# EAGLE board STM32F413CG_WM8731 (EAGLE 9.2.0)
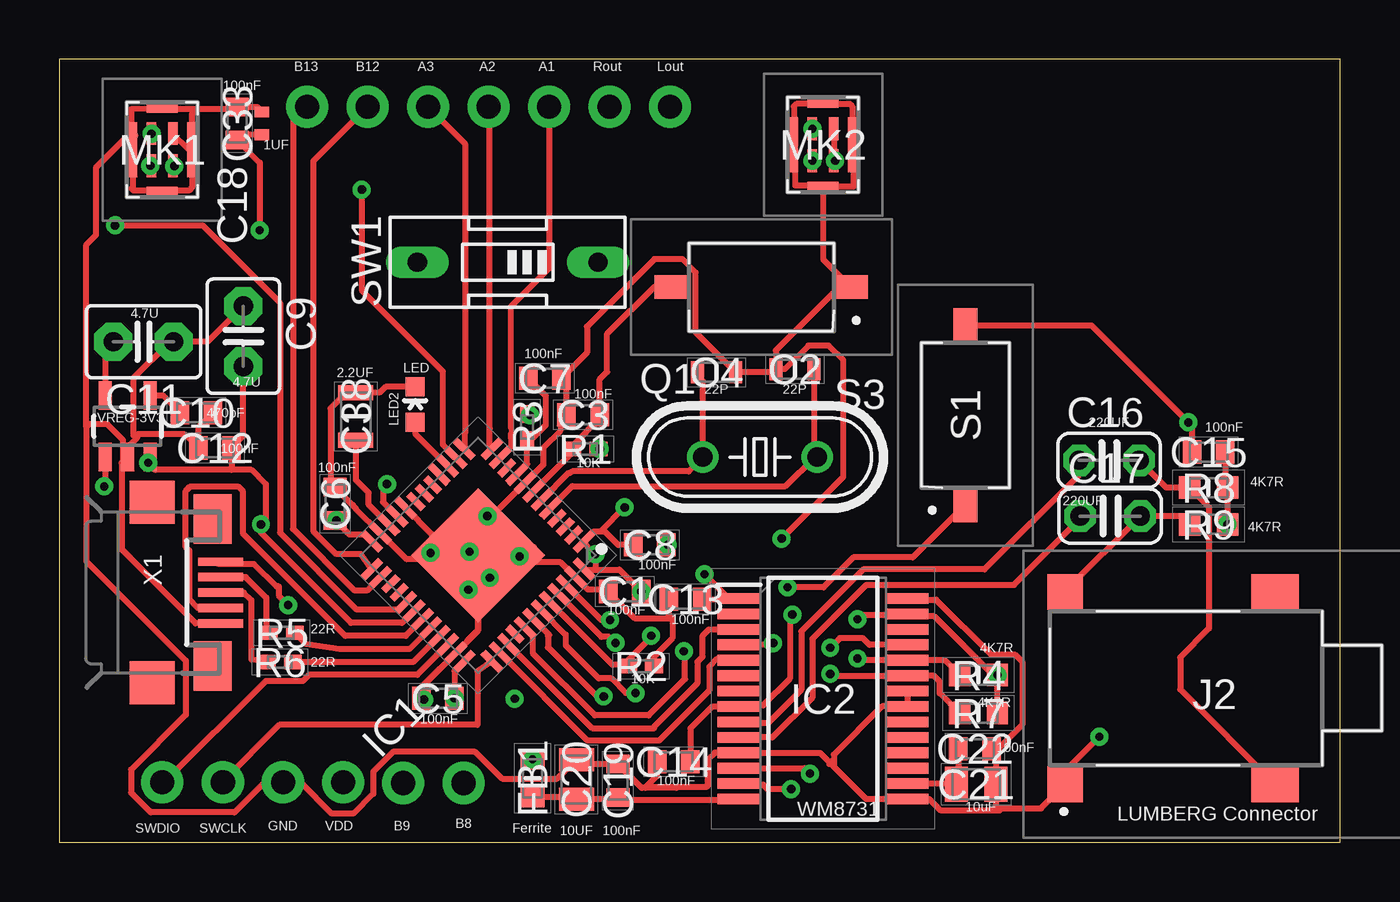
[diagram p0: board, top side]
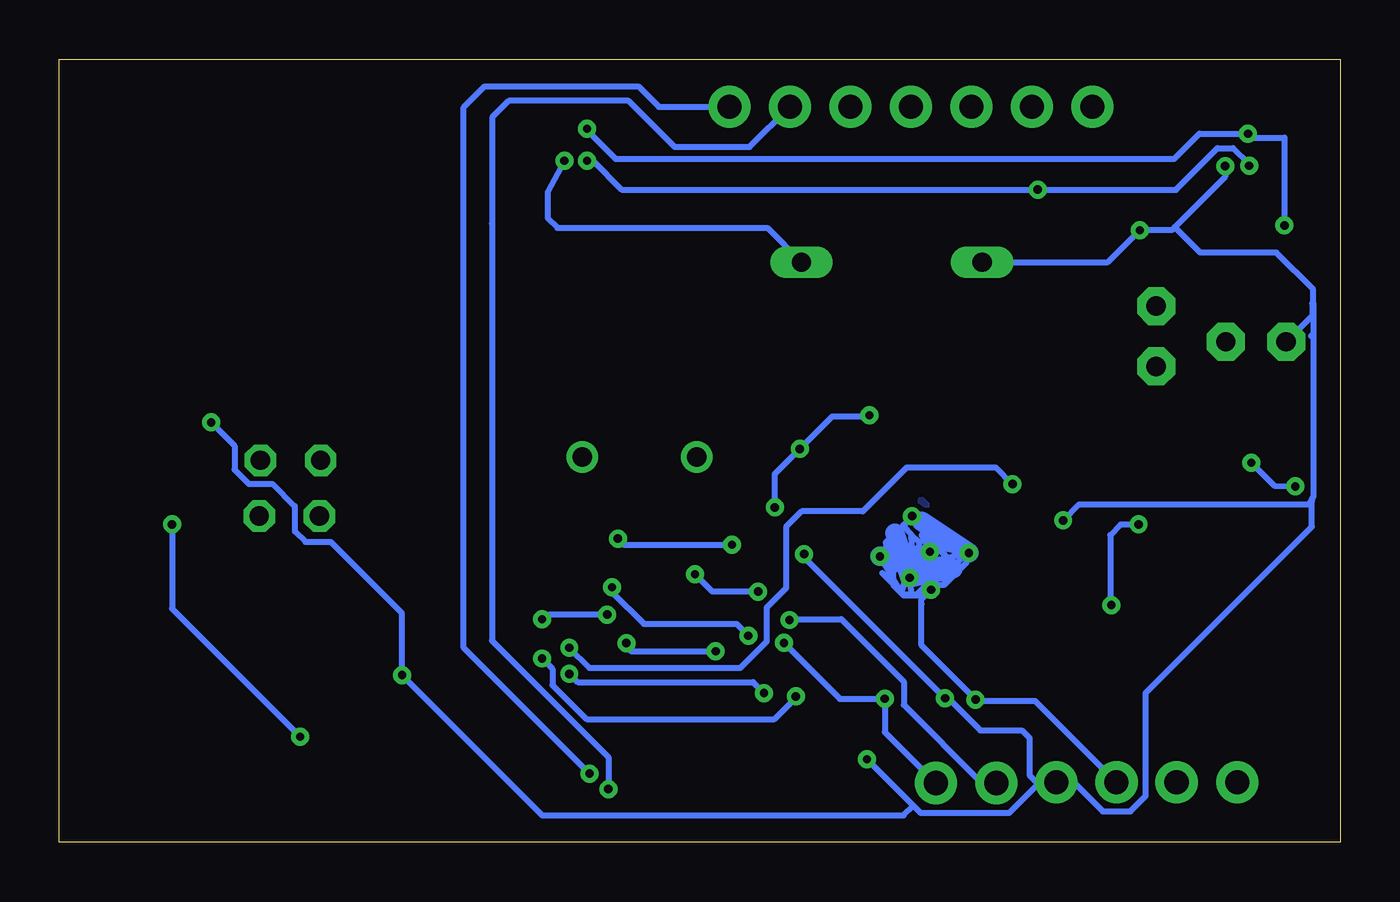
[diagram p1: board, bottom side, seen from below]

Size 54 x 33 mm. Coordinates in mm from the lower left corner, seen from the top.
Outline: 0,0 54,0 54,33 0,33 0,0
Copper layers (1*16): Top 0.035mm / dielectric 1.5mm / Bottom 0.035mm
Design rules "default *": minimum track width 6mil, minimum drill 0.35mm, track to track 0.2mm, track to pad 0.2mm, pad to pad 0.2mm, via to via 0.2mm, smd to smd 6mil, copper to edge 40mil, drill to drill 6mil, minimum pad ring 10mil, minimum via ring 8mil, stop-mask expansion 4mil, vias tented up to drill 0mil, thermal gap 10mil
Net classes: 0 default: width 0.254 mm, drill 0.35 mm

## Footprints (pad centres in the part's own frame; a part is rotated, then mirrored left to right if it is on the bottom)
CAPC1608X95N = smd 0.78 x 0.98: 1 -0.7,0; 2 0.7,0
CAPC1608X80N = smd 0.54 x 0.94: 1 -0.8,0; 2 0.8,0
C2.5-3 = drill 0.813 pad 1.6 octagon: 1 -1.27,0; 2 1.27,0
CAPC1608X87N = smd 0.78 x 0.98: 1 -0.7,0; 2 0.7,0
C025-024X044 = drill 0.813 octagon: 1 -1.27,0; 2 1.27,0
CAPC1005X55N = smd 0.457 x 0.61: 1 -0.483,0; 2 0.483,0
CAPC2012X145N = smd 0.97 x 1.47: 1 -0.83,0; 2 0.83,0
CAPC2012X145N' = smd 0.62 x 1.47: 1 -1,0; 2 1,0
BEADC1608X95N = smd 0.85 x 1: 1 -0.8,0; 2 0.8,0
QFN50P700X700X60-49N = smd 1.08 x 0.3: 1 -3.57,2.75; 5 -3.567,0.75; 6 -3.567,0.25; 7 -3.567,-0.25; 8 -3.567,-0.75; 9 -3.567,-1.25; 11 -3.567,-2.25; 12 -3.59,-2.75; 25 3.59,-2.75; 26 3.567,-2.25; 29 3.567,-0.75; 30 3.567,-0.25; 31 3.567,0.25; 32 3.567,0.75; 33 3.567,1.25; 34 3.567,1.75; 35 3.567,2.25; 36 3.58,2.75 | smd 0.85 x 0.3: 2 -3.45,2.25; 3 -3.45,1.75; 4 -3.45,1.25; 10 -3.45,-1.75; 27 3.45,-1.75; 28 3.45,-1.25 | smd 0.3 x 1.08: 13 -2.75,-3.59; 14 -2.25,-3.567; 15 -1.75,-3.567; 16 -1.25,-3.567; 20 0.75,-3.567; 21 1.25,-3.567; 22 1.75,-3.567; 23 2.25,-3.567; 24 2.75,-3.59; 37 2.75,3.58; 38 2.25,3.567; 39 1.75,3.567; 41 0.75,3.567; 42 0.25,3.567; 43 -0.25,3.567; 44 -0.75,3.567; 45 -1.25,3.567; 46 -1.75,3.567; 47 -2.25,3.567; 48 -2.75,3.57 | smd 0.3 x 0.85: 17 -0.75,-3.45; 18 -0.25,-3.45; 19 0.25,-3.45; 40 1.25,3.45 | smd 4 x 4: 49 0,0
SOP65P780X200-28N = smd 1.8 x 0.45: 1 -3.55,4.225; 2 -3.55,3.575; 3 -3.55,2.925; 4 -3.55,2.275; 5 -3.55,1.625; 6 -3.55,0.975; 7 -3.55,0.325; 8 -3.55,-0.325; 9 -3.55,-0.975; 10 -3.55,-1.625; 11 -3.55,-2.275; 12 -3.55,-2.925; 13 -3.55,-3.575; 14 -3.55,-4.225; 15 3.55,-4.225; 16 3.55,-3.575; 17 3.55,-2.925; 18 3.55,-2.275; 19 3.55,-1.625; 20 3.55,-0.975; 21 3.55,-0.325; 22 3.55,0.325; 23 3.55,0.975; 24 3.55,1.625; 25 3.55,2.275; 26 3.55,2.925; 27 3.55,3.575; 28 3.55,4.225
150302 = smd 1.5 x 1.5: 1 6.3,3.8; 4 6.3,-4.3 | smd 2 x 1.5: 2 -2.55,3.8; 3 -2.55,-4.3
1X1-HEADER-HOLE = drill 1.016 pad 1.778: 1 0,0
LED-0603 = smd 0.8 x 0.8: A 0,-0.75; C 0,0.75
MP34DT05TRA = smd 0.4 x 0.95: 1 -0.45,0.675; 2 -0.45,-0.675; 3 0.45,-0.675; 4 0.45,0.675 | smd 0.35 x 2.3: 5 -1.225,0; 6 1.225,0 | smd 1.3 x 0.35: 7 0,1.725; 8 0,-1.725
HC49/S = drill 0.813: 1 -2.413,0; 2 2.413,0
RESC1005X40N = smd 0.75 x 0.6: 1 -0.55,0; 2 0.55,0
RESC1608X55N = smd 0.9 x 0.95: 1 -0.8,0; 2 0.8,0
PTS636SK25JSMTRLFS = smd 1.45 x 1: 1 -3.775,0; 2 3.775,0
EDG-01 = drill 0.813 long: 1 0,-3.81; 2 0,3.81
SOT23-5 = smd 0.55 x 1.2: 1 -0.95,-1.3; 2 0,-1.3; 3 0.95,-1.3; 4 0.95,1.3; 5 -0.95,1.3
USB-MICROB-SMD = smd 0.35 x 1.9: D+ 0,2.9; D- -0.65,2.9; GND 1.3,2.9; ID 0.65,2.9; VBUS -1.3,2.9 | smd 1.8 x 1.9: MT1 -3.8,0; MT2 3.8,0 | smd 2.1 x 1.6: MT3 -3.1,2.55; MT4 3.1,2.55

## Placement (x,y rotation side)
C1  C0603C104M4RAC7411  [CAPC1608X95N]  23.84,10.57 180 top
C2  22P  [CAPC1608X80N]  31.01,19.94 0 top
C3  100n  [CAPC1608X95N]  22.08,18.02 0 top
C4  22P  [CAPC1608X80N]  27.71,19.81 180 top
C5  100n  [CAPC1608X95N]  15.96,6.07 0 top
C6  100n  [CAPC1608X95N]  11.63,14.27 90 top
C7  100n  [CAPC1608X95N]  20.47,19.56 180 top
C8  100n  [CAPC1608X95N]  24.89,12.54 0 top
C9  4.7u  [C2.5-3]  7.76,21.33 270 top
C10  470p  [CAPC1608X87N]  5.78,18.11 180 top
C11  4.7u  [C2.5-3]  3.55,21.1 180 top
C12  100n  [CAPC1608X95N]  6.56,16.62 0 top
C13  100n  [CAPC1608X95N]  26.4,10.25 180 top
C14  100n  [CAPC1608X95N]  25.9,3.4 0 top
C15  C0603C104M4RAC7411  [CAPC1608X95N]  48.45,16.45 180 top
C16  220UF  [C025-024X044]  44.25,16.1 0 top
C17  220UF  [C025-024X044]  44.3,13.75 0 top
C18  1UF  [CAPC1005X55N]  8.55,30.3 90 top
C19  C0603C104M4RAC7411  [CAPC1608X95N]  23.55,2.6 270 top
C20  CL21A106KAYNNNE_10UF  [CAPC2012X145N]  21.8,2.65 270 top
C21  CL21A106KAYNNNE  [CAPC2012X145N]  38.65,2.45 0 top
C22  C0603C104M4RAC7411  [CAPC1608X95N]  38.6,3.95 180 top
C33  100nf  [CAPC1608X95N]  7.5,30.3 90 top
C38  2.2UF  [CAPC2012X145N']  12.5,17.95 90 top
FB1  BLM18BD252SN1D  [BEADC1608X95N]  19.95,2.7 270 top
IC1  STM32F413CGU6  [QFN50P700X700X60-49N]  17.65,12.1 225 top
IC2  WM8731SEDS_RV  [SOP65P780X200-28N]  32.2,6.05 0 top
J2  1503_02  [150302]  48.7,6.25 180 top
JP1  [1X1-HEADER-HOLE]  9.43,2.53 270 top
JP2  [1X1-HEADER-HOLE]  6.9,2.53 270 top
JP3  [1X1-HEADER-HOLE]  4.34,2.53 270 top
JP4  [1X1-HEADER-HOLE]  11.97,2.53 90 top
JP5  [1X1-HEADER-HOLE]  17.05,2.5 0 top
JP6  [1X1-HEADER-HOLE]  10.45,31 0 top
JP7  [1X1-HEADER-HOLE]  13,31 0 top
JP8  [1X1-HEADER-HOLE]  20.65,31 0 top
JP9  [1X1-HEADER-HOLE]  18.1,31 0 top
JP10  [1X1-HEADER-HOLE]  15.55,31 0 top
JP11  [1X1-HEADER-HOLE]  14.5,2.5 0 top
JP12  [1X1-HEADER-HOLE]  23.2,31 0 top
JP13  [1X1-HEADER-HOLE]  25.75,31 0 top
LED2  [LED-0603]  15,18.45 0 top
MK1  MP34DT05TR-A  [MP34DT05TRA]  4.34,29.19 0 top
MK2  MP34DT05TR-A  [MP34DT05TRA]  32.2,29.4 0 top
Q1  [HC49/S]  29.54,16.24 0 top
R1  CRCW040210K0JNED  [RESC1005X40N]  22.18,16.58 180 top
R2  10K  [RESC1005X40N]  24.52,7.43 0 top
R3  CRCW040222R0FKED  [RESC1005X40N]  19.72,17.5 270 top
R4  CR0603-JW-472ELF  [RESC1608X55N]  38.75,7.05 180 top
R5  22R  [RESC1005X40N]  9.38,8.83 180 top
R6  22R  [RESC1005X40N]  9.3,7.6 180 top
R7  CR0603-JW-472ELF  [RESC1608X55N]  38.75,5.45 180 top
R8  CR0603-JW-472ELF  [RESC1608X55N]  48.45,14.95 0 top
R9  CR0603-JW-472ELF  [RESC1608X55N]  48.45,13.4 0 top
S1  PTS636_SK25J_SMTR_LFS  [PTS636SK25JSMTRLFS]  38.2,18 90 top
S3  PTS636_SK25J_SMTR_LFS  [PTS636SK25JSMTRLFS]  29.6,23.4 180 top
SW1  [EDG-01]  18.9,24.45 90 top
VREG-3V3  V_REG_LDOSMD  [SOT23-5]  2.88,17.54 0 top
X1  USB-MICROB-SMD  [USB-MICROB-SMD]  3.91,10.53 270 top

## Library data of the parts
C1 C3 C5-C8 C12-C15 C33 = C0603C104M4RAC7411; DESCRIPTION: KEMET - C0603C104M4RAC7411 - CAP, 0.1F, 16V, 20%, X7R, 0603; HEIGHT: 0.95mm; MANUFACTURER_NAME: Kemet; MANUFACTURER_PART_NUMBER: C0603C104M4RAC7411; MOUSER_PART_NUMBER: 80-C0603C104M4R7411; MOUSER_PRICE-STOCK: https://www.mouser.com/Search/Refine.aspx?Keyword=80-C0603C104M4R7411
C2 C4 = C1608C0G1H150J080AA_15pF; DESCRIPTION: TDK 0603 C 15pF Ceramic Multilayer Capacitor, 50 V dc, +125C, C0G Dielectric, +/-5% SMD; HEIGHT: 0.8mm; MANUFACTURER_NAME: TDK; MANUFACTURER_PART_NUMBER: C1608C0G1H150J080AA; MOUSER_PART_NUMBER: 810-C1608C0G1H150J; MOUSER_PRICE-STOCK: https://www.mouser.com/Search/Refine.aspx?Keyword=810-C1608C0G1H150J; RS_PART_NUMBER: 7882935; RS_PRICE-STOCK: https://uk.rs-online.com/web/p/products/7882935
C9 C11 = capacitor-wima
C10 = C0603C471K3RACTU_470pF; DESCRIPTION: KEMET - C0603C471K3RACTU - CAP, X7R, 470PF, 25V, 0603; HEIGHT: 0.87mm; MANUFACTURER_NAME: Kemet; MANUFACTURER_PART_NUMBER: C0603C471K3RACTU; MOUSER_PART_NUMBER: 80-C0603C471K3R; MOUSER_PRICE-STOCK: https://www.mouser.com/Search/Refine.aspx?Keyword=80-C0603C471K3R
C16 C17 = rcl; SPICEPREFIX: C
C18 = CC0402KRX5R6BB105_1UF; DESCRIPTION: CAPACITOR, 0402 1uF +/-10% 10V; HEIGHT: mm; MANUFACTURER_NAME: YAGEO (PHYCOMP); MANUFACTURER_PART_NUMBER: CC0402KRX5R6BB105; MOUSER_PART_NUMBER: 603-CC402KRX5R6BB105; MOUSER_PRICE-STOCK: https://www.mouser.com/Search/Refine.aspx?Keyword=603-CC402KRX5R6BB105
C19 C22 = C0603C104M4RAC7411_100nF; DESCRIPTION: KEMET - C0603C104M4RAC7411 - CAP, 0.1F, 16V, 20%, X7R, 0603; HEIGHT: 0.95mm; MANUFACTURER_NAME: Kemet; MANUFACTURER_PART_NUMBER: C0603C104M4RAC7411; MOUSER_PART_NUMBER: 80-C0603C104M4R7411; MOUSER_PRICE-STOCK: https://www.mouser.com/Search/Refine.aspx?Keyword=80-C0603C104M4R7411
C20 C21 = CL21A106KAYNNNE_10uF; DESCRIPTION: Samsung; HEIGHT: 1.45mm; MANUFACTURER_NAME: Samsung Electro-Mechanics; MANUFACTURER_PART_NUMBER: CL21A106KAYNNNE; MOUSER_PART_NUMBER: N/A; MOUSER_PRICE-STOCK: https://www.mouser.com/Search/Refine.aspx?Keyword=N%2FA
C38 = C2012X7R1E225K125AB; DESCRIPTION: TDK - C2012X7R1E225K125AB - CAPACITOR, MLCC, X7R, 2.2UF, 25V, 0805; HEIGHT: 1.45mm; MANUFACTURER_NAME: TDK; MANUFACTURER_PART_NUMBER: C2012X7R1E225K125AB; MOUSER_PART_NUMBER: 810-C2012X7R1E225K; MOUSER_PRICE-STOCK: https://www.mouser.com/Search/Refine.aspx?Keyword=810-C2012X7R1E225K; RS_PART_NUMBER: 9159394P; RS_PRICE-STOCK: http://uk.rs-online.com/web/p/products/9159394P
FB1 = BLM18BD252SN1D_Ferrite Bead; DESCRIPTION: 0603 Ferrite Bead,2K5,25%,50mA,1R5 Murata Ferrite Bead (Chip Ferrite Bead), 1.6 x 0.8 x 0.8mm (0603), 2500 impedance at 100 MHz; HEIGHT: 0.95mm; MANUFACTURER_NAME: Murata Electronics; MANUFACTURER_PART_NUMBER: BLM18BD252SN1D; MOUSER_PART_NUMBER: 81-BLM18BD252SN1D; MOUSER_PRICE-STOCK: https://www.mouser.com/Search/Refine.aspx?Keyword=81-BLM18BD252SN1D; RS_PART_NUMBER: 7241321P; RS_PRICE-STOCK: http://uk.rs-online.com/web/p/products/7241321P
IC1 = STM32F413CG_edited; DESCRIPTION: STMICROELECTRONICS - STM32F413CGU6 - MCU, ARM CORTEX-M4, 100MHZ, UFQFPN-48; HEIGHT: 0.6mm; MANUFACTURER_NAME: STMicroelectronics; MANUFACTURER_PART_NUMBER: STM32F413CGU6; MOUSER_PART_NUMBER: 511-STM32F413CGU6; MOUSER_PRICE-STOCK: https://www.mouser.com/Search/Refine.aspx?Keyword=511-STM32F413CGU6
IC2 = WM8731SEDS_RV_1; DESCRIPTION: WOLFSON MICROELECTRONICS - WM8731SEDS/RV - DAC, AUDIO, 24BIT, HEADPHONE, 28SSOP; HEIGHT: 2mm; MANUFACTURER_NAME: WOLFSON MICROELECTRONICS; MANUFACTURER_PART_NUMBER: WM8731SEDS/RV
J2 = 1503_02; DESCRIPTION: LUMBERG - 1503 02 - CONNECTOR, RECEPTACLE, 3.5MM PHONO, 3WAY; HEIGHT: 5mm; MANUFACTURER_NAME: LUMBERG; MANUFACTURER_PART_NUMBER: 1503 02
JP1-JP13 LED2 VREG-3V3 X1 = F405Pill
MK1 MK2 = MP34DT05TR-A; DESCRIPTION: STMICROELECTRONICS - MP34DT05TR-A - MEMS MICROPHONE, 3.6V, HCLGA-4; HEIGHT: 1mm; MANUFACTURER_NAME: STMicroelectronics; MANUFACTURER_PART_NUMBER: MP34DT05TR-A; MOUSER_PART_NUMBER: 511-MP34DT05TR-A; MOUSER_PRICE-STOCK: https://www.mouser.com/Search/Refine.aspx?Keyword=511-MP34DT05TR-A
Q1 = crystal; OC_FARNELL: 1667008; OC_NEWARK: unknown
R1 R2 = CRCW040210K0JNED; ALLIED_NUMBER: 70202522; ALLIED_PRICE-STOCK: https://www.alliedelec.com/vishay-dale-crcw040210k0jned/70202522/; DESCRIPTION: Thick Film Resistors - SMD 1/16watt 10Kohms 5%; HEIGHT: 0.4mm; MANUFACTURER_NAME: Vishay; MANUFACTURER_PART_NUMBER: CRCW040210K0JNED; MOUSER_PART_NUMBER: 71-CRCW0402J-10K-E3; MOUSER_PRICE-STOCK: https://www.mouser.com/Search/Refine.aspx?Keyword=71-CRCW0402J-10K-E3
R3 R5 R6 = CRCW040222R0FKED_22R; ALLIED_NUMBER: 70202113; ALLIED_PRICE-STOCK: https://www.alliedelec.com/vishay-dale-crcw040222r0fked/70202113/; DESCRIPTION: Vishay CRCW Series Thick Film Surface Mount Resistor 0402 Case 22 +/-1% 0.063W +/-100ppm/C; HEIGHT: 0.4mm; MANUFACTURER_NAME: Vishay; MANUFACTURER_PART_NUMBER: CRCW040222R0FKED; MOUSER_PART_NUMBER: 71-CRCW0402-22-E3; MOUSER_PRICE-STOCK: https://www.mouser.com/Search/Refine.aspx?Keyword=71-CRCW0402-22-E3; RS_PART_NUMBER: 6788983P; RS_PRICE-STOCK: http://uk.rs-online.com/web/p/products/6788983P
R4 R7-R9 = CR0603-JW-472ELF; ALLIED_NUMBER: 70154691; ALLIED_PRICE-STOCK: https://www.alliedelec.com/bourns-cr0603-jw-472elf/70154691/; DESCRIPTION: BOURNS - CR0603-JW-472ELF - RES, THICK FILM, 4K7, 5%, 0.1W, 0603, REEL; HEIGHT: 0.55mm; MANUFACTURER_NAME: Bourns; MANUFACTURER_PART_NUMBER: CR0603-JW-472ELF; MOUSER_PART_NUMBER: 652-CR0603-JW-472ELF; MOUSER_PRICE-STOCK: https://www.mouser.com/Search/Refine.aspx?Keyword=652-CR0603-JW-472ELF; RS_PART_NUMBER: 7408956P; RS_PRICE-STOCK: http://uk.rs-online.com/web/p/products/7408956P
S1 S3 = PTS636_SK25J_SMTR_LFS_tactSwitch6x3x2; DESCRIPTION: Tactile Switches Tact 50mA 12VDC, 6.0x3.5, 2.5mm H, 250gf, J leads, No ground pin, Red Actuator; HEIGHT: 2.7mm; MANUFACTURER_NAME: C & K COMPONENTS; MANUFACTURER_PART_NUMBER: PTS636 SK25J SMTR LFS; MOUSER_PART_NUMBER: 611-PTS636SK25JSMTRL; MOUSER_PRICE-STOCK: https://www.mouser.com/Search/Refine.aspx?Keyword=611-PTS636SK25JSMTRL
SW1 = special

## Nets
5V: C9.2 C12.2 IC1.30 VREG-3V3.1 VREG-3V3.3 X1.VBUS
A1: IC1.11 JP8.1
A2: IC1.12 JP9.1
A3: IC1.13 JP10.1
A4: IC1.14 MK1.2 MK2.2
A5: IC1.15 LED2.A
A8: IC1.29 MK1.1 MK2.1
A15: IC1.38 IC2.5
B3: IC1.39 IC2.3
B5: IC1.41 IC2.4
B6: IC1.42 IC2.24 R4.2
B7: IC1.43 IC2.23 R7.2
B8: IC1.45 JP5.1
B9: IC1.46 JP11.1
B10: IC1.21 IC2.25
B12: IC1.25 JP7.1
B13: IC1.26 JP6.1
GND: C1.2 C2.1 C3.1 C4.1 C5.1 C6.2 C7.1 C8.2 C9.1 C10.1 C11.1 C12.1 C13.2 C14.1 C15.1 C18.2 C19.1 C20.1 C21.2 C22.1 C33.2 C38.2 IC1.8 IC1.20 IC1.23 IC1.35 IC1.47 IC1.49 IC2.11 IC2.15 IC2.21 IC2.22 IC2.28 J2.1 JP1.1 LED2.C MK1.4 MK1.5 MK1.6 MK1.7 MK1.8 MK2.5 MK2.6 MK2.7 MK2.8 R2.2 R8.2 R9.2 S3.1 VREG-3V3.2 X1.GND
LHP: C16.1 IC2.9
N$1: C2.2 IC1.5 Q1.2
N$2: MK2.3 MK2.4 SW1.1
N$3: C3.2 IC1.7 R1.2 S3.2
N$4: C10.2 VREG-3V3.4
N$5: C7.2 IC1.9 R3.2
N$6: C16.2 J2.2 R8.1
N$7: R5.2 X1.D-
N$8: IC1.31 X1.ID
N$9: IC1.32 R5.1
N$10: R6.2 X1.D+
N$11: IC1.33 R6.1
N$12: C19.2 C20.2 FB1.2 IC2.14
N$13: IC1.44 R2.1 S1.1
N$14: C21.1 C22.2 IC2.16
N$15: IC2.12 JP13.1
N$16: IC2.13 JP12.1
N$19: C4.2 IC1.6 Q1.1
N$25: C17.2 J2.4 R9.1
N$48: C38.1 IC1.22
RHP: C17.1 IC2.10
SWCLK: IC1.37 JP2.1
SWDIO: IC1.34 JP3.1
VDD: C1.1 C5.2 C6.1 C8.1 C11.2 C13.1 C14.2 C15.2 C18.1 C33.1 FB1.1 IC1.1 IC1.24 IC1.36 IC1.48 IC2.1 IC2.8 IC2.27 JP4.1 MK1.3 R1.1 R3.1 R4.1 R7.1 S1.2 SW1.2 VREG-3V3.5

## Tracks (layer width: path | path; a pad name or v marks a point on that pad's centre or on a via)
5V  (via drill 0.35)
  Top 0.254: IC1.30 15.03,9.84 14.45,9.26 12.29,9.26 8.5,13.05 v8.5,13.4 8.7,13.6 8.7,15.1 8.1,15.7 7.26,15.7 | v9.65,10 9.25,10.4 9.25,10.78 9.16,10.78 8.21,11.73 6.71,11.73 X1.VBUS | 7.26,15.7 4.05,15.7 v3.75,16 3.91,16.16 VREG-3V3.3 | VREG-3V3.1 1.93,15.19 v1.89,15 | C9.2 7.76,17.12 C12.2 7.26,15.7
  Bottom 0.254: v8.5,13.4 9.25,13.4 9.7,12.95 9.7,10.05 v9.65,10 | v3.75,16 2.78,15.03 v1.9,15.01 v1.89,15
A1
  Top 0.2: 19.05,16.68 19.05,17.25 19.05,17.45
  Top 0.254: JP8.1 20.65,24.2 19.05,22.6 19.05,17.45 | IC1.11 18.63,16.26 19.05,16.68 19.05,16.71 19.06,16.72 19.06,16.99 19.05,17 19.05,17.25
A2
  Top 0.254: JP9.1 18.05,30.95 18.14,30.86 18.14,17.45 18.14,16.68 | 18.14,16.68 18.14,16.57 | IC1.12 18.14,16.68
A3
  Top 0.254: 17.1,16.63 17.1,16.57 | JP10.1 17.1,29.45 17.1,17.25 17.1,16.63 | IC1.13 17.1,16.63
A4  (via drill 0.35)
  Top 0.254: IC1.14 16.17,16.76 16.17,19.85 12.75,23.27 v12.75,27.51 | MK1.2 v3.84,28.52
  Bottom 0.254: v31.75,28.73 31.5,28.73 30.29,27.51 v12.75,27.51 12.57,27.51 12.64,27.5 6.93,27.5 5.17,29.26 4.53,29.26 3.84,28.57 v3.84,28.52
A5
  Top 0.254: IC1.15 16.45,15.78 15,17.23 LED2.A
A8  (via drill 0.35)
  Top 0.254: IC1.29 14.68,10.19 14.3,9.81 12.54,9.81 9.3,13.05 9.3,22.74 6.04,26 v2.35,26
  Bottom 0.254: v2.35,26 2.35,29.7 3.73,29.7 v3.89,29.86 5.93,29.86 7,28.8 30.55,28.8 31.9,30.15 31.82,30.15 MK2.1
  other vias: 31.75,30.07
A15
  Top 0.254: 18.6,7.97 22.27,4.29 25.29,4.29 27.4,6.4 27.4,7.4 27.73,7.73 28.6,7.73 IC2.5 | IC1.38 18.6,7.97 | 18.6,7.97
B3
  Top 0.254: IC1.39 18.85,8.42 22.46,4.81 25.09,4.81 25.09,4.89 26.9,6.7 26.9,7.61 27.12,7.83 27.12,8.72 27.38,8.98 IC2.3
B5  (via drill 0.35)
  Top 0.254: 19.84,8.85 IC1.41 19.96,8.73 19.96,7.98 22.59,5.36 24.84,5.36 26.38,6.89 26.38,7.83 | IC2.4 30.07,8.32 30.12,8.37 v30.09,8.4 | 26.38,7.83 26.33,7.78 v26.33,8.06 | 26.38,7.83 26.45,7.9
  Bottom 0.254: v26.33,8.06 29.91,8.06 30.25,8.4 v30.09,8.4
B6  (via drill 0.35)
  Top 0.254: v33.65,7.75 33.73,7.67 IC2.24 37.33,7.67 R4.2 | IC1.42 20.65,8.75 20.6,8.7 20.6,8.21 22.66,6.15 v22.95,6.15
  Bottom 0.254: v33.65,7.75 33.21,7.31 33.21,6.63 31.77,5.19 23.84,5.19 22.95,6.08 v22.95,6.15
B7  (via drill 0.35)
  Top 0.254: v32.5,7.1 32.6,7 35.73,7 IC2.23 36.87,7.03 37.12,6.77 37.12,6.28 R7.2 | IC1.43 21.35,8.75 21.35,8.3 22.74,6.91 23.27,6.91 23.89,6.29 v24.29,6.29
  Bottom 0.254: v32.5,7.1 32.15,6.75 24.75,6.75 v24.29,6.29
B8  (via drill 0.35)
  Top 0.254: IC1.45 20.97,10.54 22.85,8.66 23.19,8.66 v23.45,8.4
  Bottom 0.254: v23.45,8.4 21.09,6.05 v19.2,6.05 19.2,4.65 JP5.1
B9  (via drill 0.35)
  Top 0.254: v23.22,9.37 22.86,9.37 IC1.46
  Bottom 0.254: v23.22,9.37 23.18,9.41 21.03,9.41 18.39,6.77 18.39,5.79 15.1,2.5 JP11.1
B10  (via drill 0.35)
  Top 0.254: 14.02,13.96 IC1.21 13.64,14.34 13.64,14.93 v13.82,15.1 13.84,15.13 14,15.28 | IC2.25 34.16,8.32 33.87,8.61 32.91,8.61 v32.5,8.2
  Bottom 0.254: v13.82,15.1 14.52,15.8 18.27,15.8 20.12,13.95 22.71,13.95 23.36,13.3 23.36,10.71 24.18,9.89 24.18,8.46 25.29,7.35 31.65,7.35 v32.5,8.2
B12
  Top 0.254: JP7.1 10.71,28.71 10.71,13.11 11.67,12.15 12.72,12.15 IC1.25
B13
  Top 0.254: 10.25,30.8 JP6.1 10.1,31 9.85,30.75 9.85,13.21 12.46,10.61 12.97,10.61 IC1.26
GND  (via drill 0.35)
  Top 0.254: X1.GND 6.77,9.23 6.76,9.23 5.74,9.23 2.63,12.34 2.63,15.98 2.68,16.04 | 2.88,16.65 3.28,17.05 3.28,17.14 | 2.88,16.65 VREG-3V3.2 2.68,16.04 | MK1.4 5.46,29.19 MK1.6 5.6,29.23 | 15.7,12.99 IC1.20 | 17.2,12.1 16.55,12.1 | 16.55,12.1 16.29,12.1 16.29,12.35 16.01,12.06 16.01,11.98 14.63,11.93 | 15.7,12.99 15.7,12.95 16.55,12.1 | 16.85,8.12 | 16.85,8.12 IC1.35 17.13,8.4 | 17.65,11.8 17.65,8.92 | 17.65,8.92 16.85,8.12 | 20,11.8 21.13,11.8 IC1.47 22.28,10.65 23.06,10.65 C1.2 | 20,11.8 17.65,11.8 | 18.17,13.68 IC1.8 20.4,15.91 20.4,16.62 21.13,17.35 21.13,17.77 C3.1 21.38,19.35 C7.1 22.24,20.63 22.24,21.74 25.08,24.58 26.27,24.58 26.83,24.02 26.83,21.49 C4.1 30.08,19.81 C2.1 | 18.17,13.68 17.2,12.71 17.2,12.3 | 17.2,12.3 17.2,12.1 | C1.2 22.99,10.5 | 3.2,29.8 3.05,29.73 3.05,29.95 | MK2.8 31.02,27.68 31.02,29.35 MK2.5 30.97,31.02 31.08,31.12 MK2.7 33.32,31.12 33.43,31.02 MK2.6 | MK2.6 | 3.05,29.95 3.05,30.9 MK1.7 5.68,30.91 | 15,19.32 LED2.C 13.75,19.2 | 17.13,8.4 | 17.13,8.4 15.53,6.8 15.53,5.99 v15.37,6.02 15.31,6.02 C5.1 15.26,6.53 16.85,8.12 | 17.63,8.93 17.63,8.9 | 17.63,8.93 17.63,9.64 17.25,10.02 | 17.63,8.93 17.21,8.51 | 17.23,8.5 17.63,8.9 | 5.68,30.91 5.75,30.85 5.6,30.7 5.6,29.23 | MK1.5 3.12,27.61 3.05,27.55 3.13,27.46 MK1.8 5.46,27.46 5.6,27.6 5.6,29.23 | 1.14,17.5 1.14,11.84 5.33,7.66 5.33,5.37 3.02,3.06 3.02,2.1 3.86,1.26 7.38,1.26 8.65,2.53 JP1.1 10.17,2.53 11.49,1.21 12.4,1.21 13.23,2.04 13.23,2.98 14.07,3.82 17.53,3.82 18.67,2.68 20.98,2.68 C20.1 | 2.68,16.45 2.68,16.97 2.02,17.62 1.26,17.62 1.14,17.5 | 2.68,16.45 2.68,16.04 | 2.88,16.65 2.68,16.45 | 3.28,17.14 3.28,17.19 5.29,17.19 C12.1 5.86,17.49 C10.1
  Top 0.254: 3.28,17.14 3.13,17.14 3.13,19.56 4.67,21.1 C11.1 6.26,21.1 C9.1 | C20.1 | 39.33,3.92 39.48,3.77 C21.2 39.48,1.51 39.55,1.44 | 39.33,3.92 C22.1 | IC2.22 IC2.21 34.68,5.73 32.65,3.7 32.65,3.5 | C20.1 21.84,3.54 22.08,3.3 C19.1 24.55,2.3 24.7,2.3 | 32.65,3.19 34.02,1.82 IC2.15 36.68,1.82 37.17,1.34 39.65,1.34 39.55,1.44 | 32.65,3.19 32.07,3.77 29.52,3.77 | 29.52,3.77 29.52,3.78 27.63,3.78 27.33,3.47 27.33,2.38 27.28,2.33 24.97,2.33 | 26,2.3 24.7,2.3 | IC2.11 29.52,3.77 | 39.55,1.44 41.39,1.44 J2.1 42.4,3 v43.85,4.45 | 32.65,3.5 32.45,3.29 | 13.75,19.2 | C14.1 25.2,2.8 24.85,2.45 | 48.95,16.25 C15.1 49.15,15.05 R8.2 R9.2 | R2.2 25.07,7.83 25.85,8.61 25.85,9.45 25.7,9.45 | 25.7,9.45 C13.2 | IC2.28 35.8,10.23 36.97,10.23 39.29,7.9 40.32,7.9 40.6,7.62 40.6,4.95 39.58,3.92 39.33,3.92 | 25.7,9.45 24.26,9.45 C1.2 | 32.65,3.5 32.65,3.19 | 5.68,30.91 7.42,30.91 C33.2 8.33,31 C18.2 | 1.14,17.5 1.14,25.19 1.55,25.6 1.55,28.45 3.05,29.95 | MK2.8 32.2,24.57 S3.1 32.88,23.4 30.21,20.73 C2.1 | 13.75,19.2 13.5,18.95 C38.2 12.1,18.95 11.44,18.29 11.44,15.16 C6.2 11.63,14.94 12.33,14.24 12.34,14.24 12.5,14.08 12.5,14.07 IC1.23 14.63,11.93 | C2.1 30.57,19.94 31.57,20.94 32.45,20.94 33.05,20.34 33.05,15.4 v30.45,12.8 | 17.4,12.1 17.2,12.1 | IC1.49 17.4,12.1 | 17.4,12.1 17.2,12.3 | MK2.8 32.23,27.65 33.5,27.65 33.5,29.33 MK2.6 | 24.97,2.33 24.9,2.33 | 24.7,2.3 24.85,2.45 | 24.85,2.45 24.97,2.33 | 17.6,10.3 v17.25,10.65 | v25.64,12.54 C8.2 | 15.7,12.99 15.78,12.9 15.95,12.9 | IC1.49 18,12.45 20,12.45 | 17.63,8.9 17.65,8.92 | 18.16,13.05 18.17,13.07 18.17,13.68 | 18.16,13.05 17.75,12.64 17.75,12.2 IC1.49 | 18.16,13.05 18.74,13.05 20,11.8
  Top 0.254: 14.63,11.93 17.45,12.09 IC1.49 | IC1.49 17.65,11.8
  Bottom 0.254: JP1.1 12.87,5.97 15.32,5.97 | v15.37,6.02 15.32,5.97 | v43.85,4.45 49.25,9.85 R9.2 | v30.45,12.8 30.19,12.54 v25.64,12.54 | 15.32,5.97 17.65,8.3 17.65,10.05 | 17.67,10.08 17.65,10.05 | 17.25,10.64 v17.25,10.65 17.5,10.4 18.05,10.4 | 17.65,10.05 17.65,10.24 | 17.65,10.24 17.25,10.64 | 18.44,10.45 18.4,10.4 18.05,10.4 | 19.3,11.35 18.95,11 | 18.95,11 18.86,10.9 | 17.5,11.5 17.45,11.44 | v19.4,12.05 19.15,11.8 | 19.15,11.8 19.11,11.8 | 19.15,11.8 18.95,11.6 18.95,11.45 | 18.95,11.45 18.95,11.3 | 18.95,11.3 18.95,11 | v15.65,12.2 15.74,12.11 15.74,11.81 16.23,11.33 | 16.53,11.03 16.71,10.85 17.04,10.85 17.25,10.64 | 16.53,11.03 16.23,11.33 | 18.41,13.25 18.41,13.34 18.05,13.7 v18.05,13.75 | v19.4,12.05 19.16,12.29 19.16,12.64 18.77,13.02 18.42,13.37 | v18.05,13.75 18.07,13.72 | 18.07,13.72 18.42,13.37 | v17.3,12.25 17.48,12.07 | 17.48,12.07 17.6,11.95 17.69,11.95 | v17.3,12.25 17.45,12.11 17.45,11.44 | 17.65,10.65 17.45,10.86 17.45,11.44 | 17.65,10.65 17.65,10.24 | 16.23,11.33 16.39,11.62 | 16.39,11.62 16.43,11.7 | 16.43,11.7 16.65,12.1 17.19,12.56 | 17.19,12.56 17.65,12.95 v17.3,12.25 | 18.86,10.9 18.86,11.35 18.95,11.45 | 17.65,10.65 17.86,10.45 18.44,10.45 | 18.44,10.45 18.52,10.53 | 18.52,10.53 18.86,10.86 18.86,10.9 | v18.15,11.15 18.15,11.65 | 18.15,11.65 17.48,12.07 | 18.15,11.65 18.52,10.53 | 18.15,11.65 18.16,11.64 18.61,11.64 18.95,11.3 | 18.15,11.65 17.7,12.1 17.22,12.59 17.19,12.56 | 18.15,11.65 17.75,12.06 17.75,12.21 | 17.75,12.21 16.8,13.15 17.65,13.53 18.07,13.72 | 18.15,11.65 16.43,11.7 | 18.15,11.65 16.53,11.03 | 17.75,12.21 17.75,12.64 18.08,12.97 | 18.42,13.37 18.42,13.32 18.08,12.97 | 18.15,11.65 v15.65,12.2
  Bottom 0.254: v18.15,11.15 v19.4,12.05 | 18.44,10.45 v19.4,12.05 | 18.05,10.4 v18.15,11.15 | v18.05,13.75 16.97,12.41 | 16.97,12.41 16.88,12.29 v17.3,12.25 | v15.65,12.2 16.97,12.41 | v15.65,12.2 16.39,11.62 | 18.04,12.09 18.08,12.97
  Bottom 0.813: v19.4,12.05 18.04,12.09 17.7,12.1 | 18.77,13.02 v18.15,11.15 16.34,11.53 | v15.65,12.2 17.65,13.53
  other vias: 49.25,13.4
GNG
  pour Bottom: 15.15,12.2 15.4,12.2 17.65,14.45 20,12.1 17.8,9.9 17.4,9.9 15.15,12.15
LHP
  Top 0.254: IC2.9 28.7,5.02 29.87,5.02 31.29,6.44 31.29,8.89 33.9,11.5 39,11.5 42.98,15.48 C16.1
N$1
  Top 0.254: C2.2 31.81,16.38 Q1.2 31.85,16.24 30.62,15.01 21.62,15.01 IC1.5
N$2  (via drill 0.35)
  Top 0.254: v32.71,28.73 MK2.3 MK2.4
  Bottom 0.254: v32.71,28.73 33.41,27.4 33.41,26.3 33,25.89 24.15,25.89 SW1.1
N$3
  Top 0.254: R1.2 | 25.98,23.55 S3.2 25.07,23.4 23.1,21.43 23.1,19.83 22.78,19.51 C3.2 22.78,17.86 21.63,16.71 R1.2 | R1.2 21.63,16.43 19.91,14.72 IC1.7
N$4
  Top 0.254: C10.2 4.35,18.84 VREG-3V3.4
N$5
  Top 0.254: C7.2 20.5,18.83 20.5,17.58 19.87,16.95 R3.2 19.72,15.94 IC1.9
N$6
  Top 0.254: 51.3,2.45 J2.2 47.25,6.45 47.25,7.8 48.47,9.02 48.47,14.13 R8.1 46.67,14.95 C16.2
N$7
  Top 0.254: R5.2 8.73,8.93 8.73,10.31 7.86,11.18 X1.D-
N$8
  Top 0.254: IC1.31 15.39,9.48 14.61,8.7 12.06,8.7 7.75,13.01 7.75,14.8 7.54,15.01 5.52,15.01 5.45,14.93 | X1.ID 7.11,9.88 5.84,9.88 5.48,10.24 5.48,12.3 5.33,12.45 5.33,14.82 5.45,14.93 | 5.45,14.93 5.45,14.95
N$9
  Top 0.254: IC1.32 15.74,9.13 14.76,8.15 11.81,8.15 10.4,8.36 R5.1
N$10
  Top 0.254: R6.2 8.09,7.71 8.09,10.22 7.78,10.53 X1.D+
N$11
  Top 0.254: IC1.33 16.09,8.78 14.91,7.59 R6.1
N$12
  Top 0.254: 20.27,1.98 20.2,1.9 FB1.2 21.72,1.9 C20.2 23.47,1.82 C19.2 23.68,1.77 28.6,1.77 IC2.14
N$13  (via drill 0.35)
  Top 0.254: IC1.44 23.33,7.48 23.92,7.48 R2.1 23.97,7.67 24.98,8.68 v24.95,8.71 | v30.7,10.75 32.22,10.75 33.48,12.01 35.98,12.01 S1.1
  Bottom 0.254: v24.95,8.71 25.45,9.21 29.36,9.21 30.7,10.55 v30.7,10.75
N$14
  Top 0.254: IC2.16 37.8,2.48 C21.1 37.9,2.53 C22.2
N$15  (via drill 0.35)
  Top 0.254: IC2.12 31.43,3.12 v31.65,2.9
  Bottom 0.254: v31.65,2.9 36.95,8.2 36.95,30.98 36.07,31.86 29.58,31.86 28.73,31 JP13.1
N$16  (via drill 0.35)
  Top 0.254: IC2.13 28.7,2.43 29.67,2.43 29.85,2.24 v30.85,2.24
  Bottom 0.254: v30.85,2.24 30.85,3.6 35.76,8.51 35.76,26.09 35.75,26.1 35.75,30.55 35.05,31.25 30,31.25 28.06,29.31 24.89,29.31 JP12.1
N$19
  Top 0.254: C4.2 27.13,19.44 Q1.1 26.53,15.64 21.62,15.64 21.53,15.57 21.48,15.57 IC1.6
N$25
  Top 0.254: J2.4 42.4,10.58 C17.2 47.3,13.75 R9.1
N$48
  Top 0.254: IC1.22 13.05,14.23 13.05,14.73 12.5,15.28 C38.1
RHP
  Top 0.254: IC2.10 30.07,4.42 31.74,6.1 31.74,8.57 34.02,10.85 40.25,10.85 43.03,13.63 C17.1
SWCLK
  Top 0.254: IC1.37 17.63,7.2 17.63,4.95 9.27,4.95 6.9,2.58 JP2.1
SWDIO
  Top 0.254: 16.45,8.41 IC1.34 15.09,7.06 10.53,7.06 10.27,6.8 8.7,6.8 4.43,2.53 JP3.1
VDD  (via drill 0.35)
  Top 0.152: MK1.3 4.79,28.32 4.84,28.32
  Top 0.254: C8.1 23.56,12.54 23,13.1 22.82,13.1 | 22.82,13.1 22.54,13.1 IC1.1 22.48,12.15 v22.6,12.15 22.6,11.5 | IC1.24 12.89,12.97 12.23,12.97 C6.1 v11.68,13.57 | v4.85,28.5 v4.84,28.49 4.84,28.32 | 22.82,13.1 v23.83,14.12 23.9,14.18 | IC1.36 16.66,7.22 C5.2 | IC1.48 22.14,11.5 22.6,11.5 | C11.2 1.93,20.75 VREG-3V3.5 | IC2.1 28.35,10.28 | 28.35,10.28 28.23,10.28 v27.2,11.3 | C14.2 26.6,4.8 27.52,5.72 IC2.8 28.7,5.77 29.67,5.77 30.8,6.91 30.8,9.45 30.9,9.55 v30.9,9.6 | v33.65,9.4 33.83,9.58 35.7,9.58 IC2.27 35.85,9.53 36.89,9.53 39.37,7.05 R4.1 R7.1 | C1.1 23.61,11.5 22.6,11.5 | C13.1 28.32,10.25 28.35,10.28 | v19.84,18 19.79,18.05 R3.1 | C15.2 47.75,17.55 v47.6,17.7 43.52,21.77 S1.2 | C18.1 7.72,29.82 C33.1 8.45,28.65 v8.45,25.8 | R1.1 v22.78,16.58
  Bottom 0.254: 1.23,21.35 1.14,21.44 | C11.2 1.18,22.2 1.18,22.7 1.14,22.74 | 1.14,21.44 1.14,14.54 1.19,14.49 1.19,14.39 | 1.19,14.39 1.34,14.24 11.01,14.24 v11.68,13.57 | SW1.2 9.8,24.45 v8.45,25.8 7.11,25.8 6.98,25.93 | 4.8,28.55 v4.85,28.5 4.85,28.06 6.98,25.93 | 1.14,22.74 1.14,23.3 2.69,24.85 5.9,24.85 6.98,25.93 | JP4.1 12.8,2.53 13.1,2.83 13.1,4.4 13.43,4.72 15.18,4.72 16.52,6.07 C5.2 22.6,12.01 v22.6,12.15 | 1.14,22.74 1.14,21.44 | 1.19,14.39 1.19,13.31 8.21,6.29 8.21,1.95 8.85,1.31 10.01,1.31 11.23,2.53 JP4.1 | v30.9,9.6 33.35,9.6 33.65,9.3 v33.65,9.4 | JP4.1 12.67,2.53 13.97,1.23 17.68,1.23 18,1.55 | 18,1.55 FB1.1 | C1.1 26.47,10.57 v27.2,11.3 | v23.83,14.12 23.83,15.53 v22.78,16.58 21.41,17.95 19.85,17.95 19.84,17.96 v19.84,18 | 18,1.55 18.41,1.14 33.64,1.14 R4.1 39.55,9.65 42.56,12.66 43.62,12.66 44.07,13.11 44.07,14.17 45.01,15.11 46.01,15.11 46.61,15.71 46.61,16.71 v47.6,17.7
  other vias: 16.66,6.07 19.95,3.5 24.54,10.57 39.55,7.05

## Text on the board
tPlace: 100nF | B13 | B12 | A3 | A2 | A1 | Rout | Lout | 1UF | 4.7U | 2.2UF | LED | 100nF | 4.7U | 100nF | 22P | 22P | 470pF | 220UF | 100nF | 100nF | 100nF | 10K | 4K7R | 220UF | 4K7R | 100nF | 100nF | 22R | 100nF | 4K7R | 22R | 10K | 4K7R | 100nF | 100nF | 100nF | B8 | WM8731 | 10uF | LUMBERG Connector | SWDIO | SWCLK | GND | VDD | B9 | Ferrite | 10UF | 100nF